# Altium PCB PCB-15_19_prototyp.PcbDoc (part 3 of 4)
Units mm, origin at the board's own origin, x right, y up, seen from the top; angles counter-clockwise.
Board outline 190 x 150 mm, 8 copper layers (Top Layer, VCC3V3, Internal Plane 1, Internal Plane 2, Mid-Layer 1, GND, Mid-Layer 2, Bottom Layer), stack 1.301 mm thick; 129 components, 396 nets, 1206 pads, 700 vias.
Unrouted connection lines stored in the file: 9.
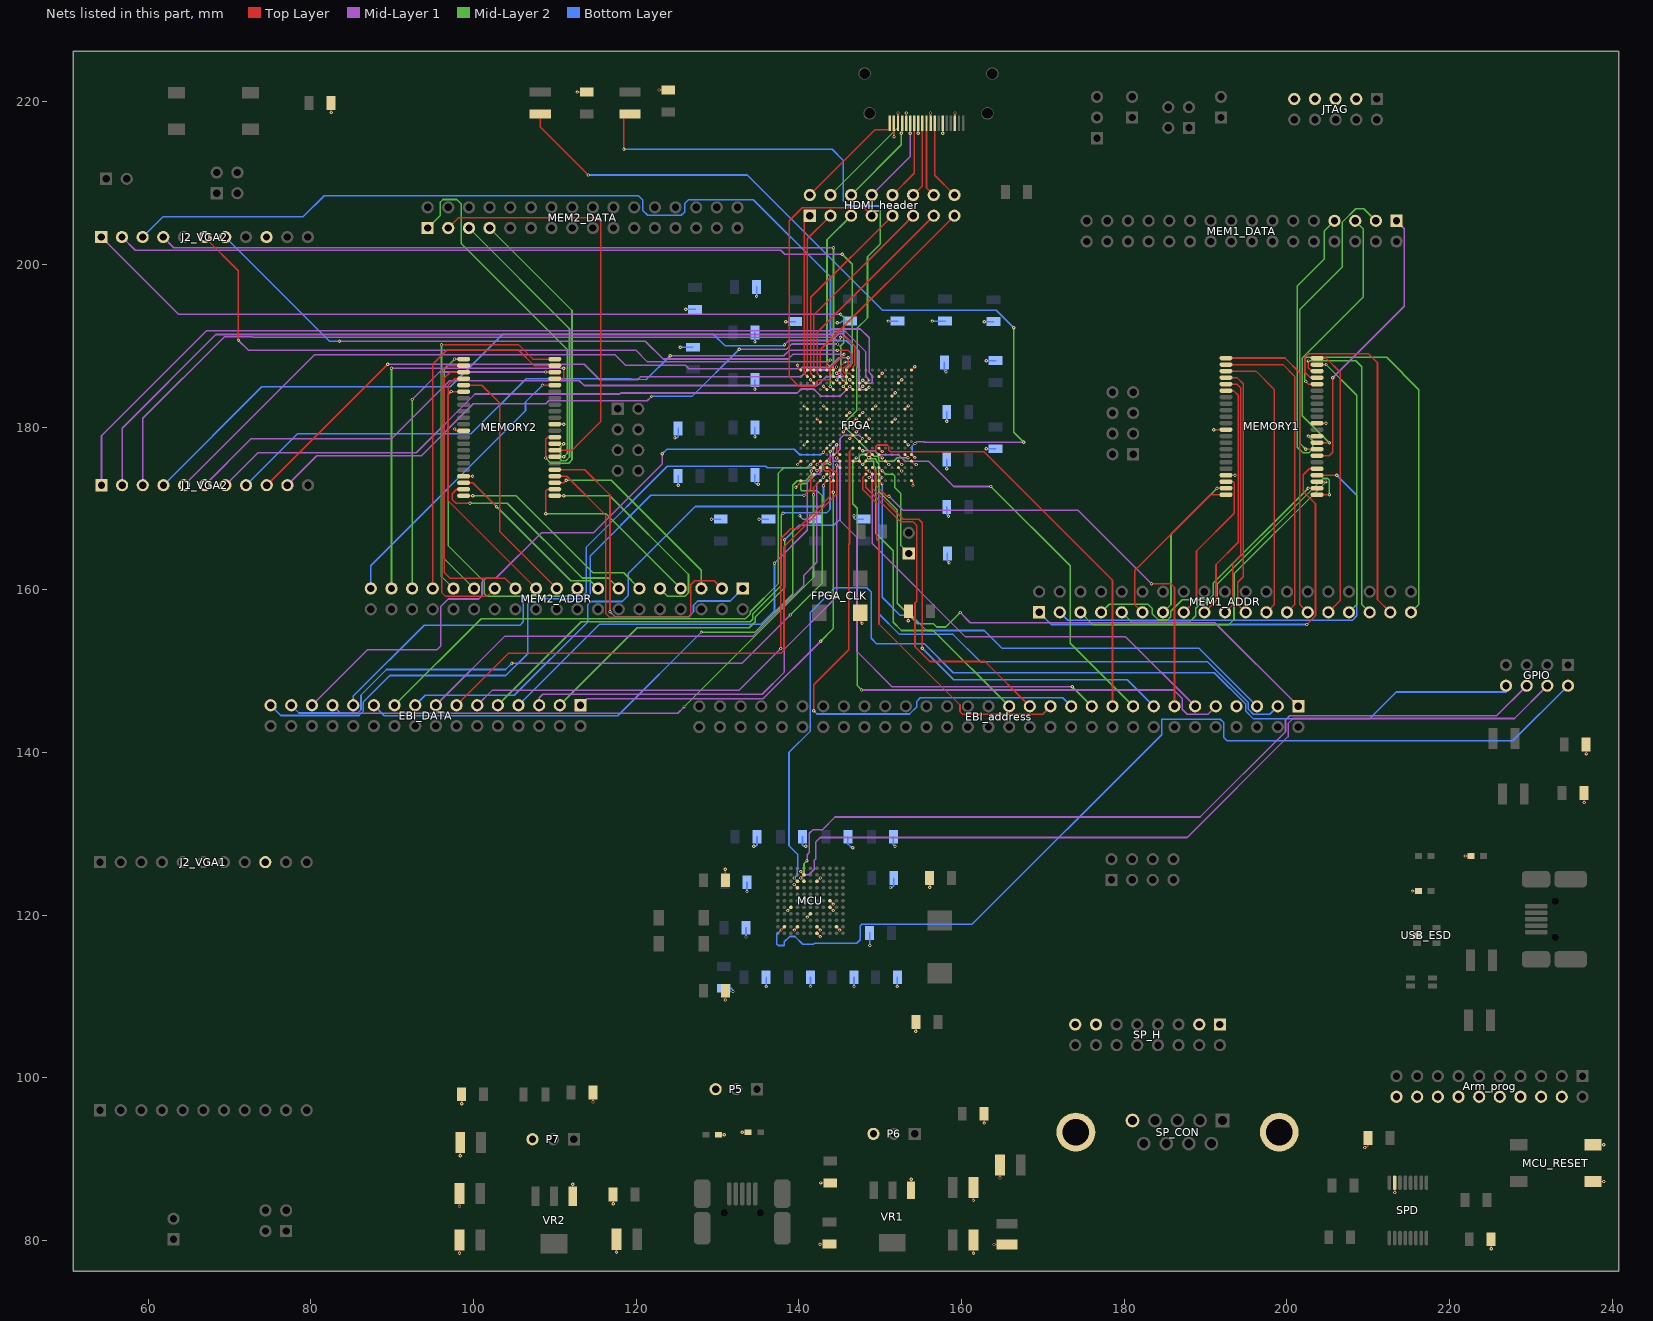
[diagram p9: the nets of this part, all layers, seen from the top]

## Via types
v1: diameter 0.4, hole 0.2, Top Layer to Bottom Layer, 696 vias
v2: diameter 7, hole 5, Top Layer to Bottom Layer, 4 vias

## Nets (pads, with @x,y where several pads share a name; then routed paths per layer and width w, separated by ;. In a path a pad name is that pad's centre, name@x,y a point inside that pad or via, vN(x,y) a via of type N, cw(c..) or ccw(c..) an arc to the next point about the centre after c; other vN are vias at no path point) (continued)
FPGA.A15: EBI_address.29 FPGA.R10 | length 41.4
  Top Layer w0.2: FPGA.R10@147.447,175.807 147.842,175.412 v1(147.853,175.412)
  Mid-Layer 2 w0.2: v1(147.853,175.412) 148.248,175.807 149.149,175.807 149.235,175.721 149.235,175.207 149.454,174.988 149.454,166.965 151.613,164.806 151.613,156.007 152.629,154.99 156.541,154.99 EBI_address.29@165.862,145.669
FPGA.A16: EBI_address.27 FPGA.V11 | length 41.1
  Top Layer w0.2: FPGA.V11@148.247,173.407 148.241,173.401 148.241,172.613 152.509,168.345 154.026,168.345 154.483,167.888 154.483,158.585 154.286,158.388 154.286,153.003 156.108,151.181 162.89,151.181 EBI_address.27@168.402,145.669
FPGA.A17: EBI_address.25 FPGA.U11 | length 46
  Top Layer w0.2: FPGA.U11@148.247,174.207 147.853,173.813 147.853,172.314 149.571,170.596 149.571,166.194 149.852,165.913 149.852,155.794 159.817,145.829 159.817,145.009 160.122,144.704 169.977,144.704 EBI_address.25@170.942,145.669
FPGA.A18: EBI_address.23 FPGA.N9 | length 67.7
  Top Layer w0.2: v1(141.844,145.115) 141.844,148.306 146.152,152.614 146.152,165.54 146.228,165.616 146.228,176.988 FPGA.N9@146.647,177.407
  Bottom Layer w0.2: v1(141.844,145.115) 142.24,144.719 153.619,144.719 154.518,145.618 154.518,146.304 154.925,146.71 172.441,146.71 EBI_address.23@173.482,145.669
FPGA.A19: EBI_address.21 FPGA.M10 | length 63.3
  Top Layer w0.2: FPGA.M10@147.447,178.207 v1(147.828,178.588)
  Mid-Layer 1 w0.2: v1(147.828,178.588) 147.409,179.007 145.491,179.007 145.059,178.575 145.059,177.292 144.167,176.4 144.167,176.051 144.434,175.784 144.841,175.784 145.059,175.565 145.059,168.504 147.142,166.421 147.142,152.4 151.46,148.082 v1(173.609,148.082)
  Mid-Layer 2 w0.2: v1(173.609,148.082) EBI_address.21@176.022,145.669
FPGA.A20: EBI_address.19 FPGA.P11 | length 53.7
  Top Layer w0.2: FPGA.P11@148.247,176.607 148.653,177.013 149.352,177.013 149.454,177.114 149.454,177.597 149.657,177.8 150.851,177.8 151.054,177.597 151.054,177.19 151.257,176.987 162.738,176.987 178.562,161.163 EBI_address.19@178.562,145.669
FPGA.A21: EBI_address.17 FPGA.N10 | length 52.4
  Top Layer w0.2: FPGA.N10@147.447,177.407 147.765,177.089 v1(147.853,177.089)
  Mid-Layer 1 w0.2: v1(147.853,177.089) 149.353,177.089 149.835,176.607 152.248,176.607 153.036,175.819 155.931,175.819 159.055,172.695 v1(163.601,172.695)
  Mid-Layer 2 w0.2: v1(163.601,172.695) 173.355,162.941 173.355,153.416 EBI_address.17@181.102,145.669
FPGA.A22: EBI_address.15 FPGA.V12 | length 55.7
  Top Layer w0.2: FPGA.V12@149.047,173.407 149.047,172.441 152.832,168.656 154.762,168.656 155.169,168.25 v1(155.169,152.806)
  Bottom Layer w0.2: v1(155.169,152.806) 159.055,148.92 180.391,148.92 EBI_address.15@183.642,145.669
FPGA.A23: EBI_address.13 FPGA.T12 | length 58.9
  Top Layer w0.2: FPGA.T12@149.047,175.007 149.428,174.626 149.428,172.878 150.805,171.501 v1(151.079,171.501) ; v1(183.363,160.731) 185.725,160.731 186.182,160.274 EBI_address.13@186.182,145.669
  Mid-Layer 1 w0.2: v1(151.079,171.501) 152.806,169.774 174.32,169.774 v1(183.363,160.731)
FPGA.A24: EBI_address.11 FPGA.T11 | length 57.8
  Top Layer w0.2: FPGA.T11@148.247,175.007 148.247,174.701 148.539,174.701 v1(148.641,174.6)
  Mid-Layer 1 w0.2: v1(148.641,174.6) 149.047,174.193 149.047,165.65 160.494,154.203 180.188,154.203 EBI_address.11@188.722,145.669
FPGA.A25: EBI_address.9 FPGA.R11 | length 77.7
  Top Layer w0.2: FPGA.R11@148.247,175.807 148.247,175.997 148.336,175.997 v1(148.565,176.225)
  Mid-Layer 1 w0.2: v1(147.752,147.676) 186.106,147.676 187.147,146.634 187.147,145.313 187.757,144.704 190.297,144.704 EBI_address.9@191.262,145.669
  Mid-Layer 2 w0.2: v1(147.752,147.676) 147.193,148.234 147.193,170.028 146.634,170.586 146.634,175.565 146.876,175.807 147.32,175.807 147.447,175.934 147.447,176.378 147.701,176.632 148.158,176.632 v1(148.565,176.225)
FPGA.AD00: EBI_DATA.31 FPGA.U3 | length 87.5
  Top Layer w0.2: v1(140.64,171.602) 141.453,172.415 141.453,173.813 FPGA.U3@141.847,174.207
  Bottom Layer w0.2: EBI_DATA.31@75.057,145.796 76.307,144.546 85.928,144.546 86.467,145.085 86.467,146.231 89.69,149.454 103.962,149.454 106.655,152.146 106.655,158.242 107.29,158.877 113.868,158.877 114.351,159.36 114.351,164.16 121.793,171.602 v1(140.64,171.602)
FPGA.AD01: EBI_DATA.29 FPGA.P6 | length 94.1
  Top Layer w0.2: v1(143.84,175.489) 143.84,176.2 FPGA.P6@144.247,176.607
  Mid-Layer 1 w0.2: v1(104.724,150.978) 133.02,150.978 v1(138.938,156.896)
  Mid-Layer 2 w0.2: v1(138.938,156.896) 142.9,160.858 142.9,171.526 142.24,172.187 140.36,172.187 140.233,172.314 140.233,172.923 140.372,173.061 140.891,173.061 142.048,174.219 142.443,174.219 142.799,174.574 142.799,175.489 v1(143.84,175.489)
  Bottom Layer w0.2: EBI_DATA.29@77.597,145.796 78.547,144.846 85.75,144.846 86.167,145.263 86.167,147.051 89.306,150.19 103.937,150.19 v1(104.724,150.978)
FPGA.AD02: EBI_DATA.27 FPGA.N5 | length 81.6
  Top Layer w0.2: v1(143.027,176.911) 143.027,176.987 FPGA.N5@143.447,177.407
  Mid-Layer 1 w0.2: EBI_DATA.27@80.137,145.796 86.97,152.629 95.504,152.629 95.961,153.086 95.961,157.937 96.881,158.857 100.666,158.857 101.041,159.233 101.041,160.934 101.504,161.397 102.748,161.397 108.356,167.005 114.757,167.005 123.215,175.463 v1(123.215,176.708)
  Bottom Layer w0.2: v1(123.215,176.708) 123.781,177.273 139.44,177.273 140.106,176.606 142.723,176.606 v1(143.027,176.911)
FPGA.AD03: EBI_DATA.25 FPGA.V4 | length 78.7
  Top Layer w0.2: v1(141.808,171.665) 141.808,172.568 FPGA.V4@142.647,173.407
  Mid-Layer 1 w0.2: EBI_DATA.25@82.677,145.796 83.642,144.831 125.12,144.831 v1(125.882,145.593)
  Mid-Layer 2 w0.2: v1(125.882,145.593) 141.808,161.519 v1(141.808,171.665)
FPGA.AD04: EBI_DATA.23 FPGA.T4 | length 75.6
  Top Layer w0.2: v1(142.24,174.625) 142.265,174.625 FPGA.T4@142.647,175.007
  Bottom Layer w0.2: EBI_DATA.23@85.217,145.796 85.217,146.929 93.939,155.651 105.715,155.651 106.121,156.058 106.121,158.877 106.426,159.182 113.386,159.182 113.843,159.639 113.843,165.202 123.825,175.184 135.942,175.184 136.119,175.007 141.858,175.007 v1(142.24,174.625)
FPGA.AD05: EBI_DATA.21 FPGA.T3 | length 75.4
  Top Layer w0.2: v1(141.529,174.6) 141.529,174.689 FPGA.T3@141.847,175.007
  Mid-Layer 2 w0.2: v1(128.023,154.795) 134.602,154.795 139.244,159.437 139.244,172.849 139.807,173.412 140.818,173.412 141.529,174.123 v1(141.529,174.6)
  Bottom Layer w0.2: EBI_DATA.21@87.757,145.796 89.027,144.526 117.754,144.526 v1(128.023,154.795)
FPGA.AD06: EBI_DATA.19 FPGA.R3 | length 72.1
  Top Layer w0.2: v1(141.453,175.412) FPGA.R3@141.847,175.807
  Mid-Layer 2 w0.2: EBI_DATA.19@90.297,145.796 100.951,156.45 133.455,156.45 134.036,157.031 134.036,157.302 137.49,160.757 137.49,174.346 138.151,175.006 141.046,175.006 v1(141.453,175.412)
FPGA.AD07: EBI_DATA.17 FPGA.V5 | length 66.4
  Top Layer w0.2: v1(143.027,172.784) 143.027,172.987 FPGA.V5@143.447,173.407
  Bottom Layer w0.2: EBI_DATA.17@92.837,145.796 94.056,147.015 105.029,147.015 114.071,156.058 114.071,158.176 114.452,158.557 118.298,158.557 119.05,159.309 119.05,162.027 127.254,170.231 142.875,170.231 143.027,170.383 v1(143.027,172.784)
FPGA.AD08: EBI_DATA.15 FPGA.U5 | length 66.2
  Top Layer w0.2: v1(143.027,173.838) 143.078,173.838 FPGA.U5@143.447,174.207
  Mid-Layer 1 w0.2: EBI_DATA.15@95.377,145.796 103.886,154.305 134.366,154.305 140.589,160.528 140.589,161.747 142.215,163.373 142.215,173.025 v1(143.027,173.838)
FPGA.AD09: EBI_DATA.13 FPGA.T5 | length 69
  Top Layer w0.2: EBI_DATA.13@97.917,145.796 104.292,152.171 137.77,152.171 138.176,152.578 138.176,165.303 144.653,171.78 144.653,174.346 144.399,174.6 144.117,174.6 143.71,175.007 FPGA.T5@143.447,175.007
FPGA.AD10: EBI_DATA.11 FPGA.R5 | length 67
  Top Layer w0.2: v1(137.77,152.781) 137.77,166.268 139.014,167.512 139.852,167.512 143.84,171.501 143.84,174.447 143.688,174.6 143.256,174.6 143.053,174.803 143.053,175.413 FPGA.R5@143.447,175.807
  Mid-Layer 1 w0.2: EBI_DATA.11@100.457,145.796 102.286,147.625 132.613,147.625 v1(137.77,152.781)
FPGA.AD11: EBI_DATA.9 FPGA.P7 | length 65.9
  Top Layer w0.2: v1(144.653,177.825) 144.653,177.001 FPGA.P7@145.047,176.607
  Mid-Layer 2 w0.2: EBI_DATA.9@102.997,145.796 113.259,156.058 134.036,156.058 134.341,156.362 134.341,157.023 137.846,160.528 137.846,169.189 v1(138.049,169.393)
  Bottom Layer w0.2: v1(138.049,169.393) 138.146,169.489 143.454,169.489 143.84,169.875 143.84,173.101 144.253,173.514 144.253,177.425 v1(144.653,177.825)
FPGA.AD12: EBI_DATA.7 FPGA.N6 | length 59.5
  Top Layer w0.2: v1(143.853,177.013) FPGA.N6@144.247,177.407
  Mid-Layer 1 w0.2: v1(137.008,163.271) 141.046,167.31 141.046,173.228 142.037,174.219 142.443,174.219 142.646,174.422 142.646,175.11 143.853,176.317 v1(143.853,177.013)
  Bottom Layer w0.2: EBI_DATA.7@105.537,145.796 115.494,155.753 135.342,155.753 137.008,157.418 v1(137.008,163.271)
FPGA.AD13: EBI_DATA.5 FPGA.T7 | length 61
  Top Layer w0.2: v1(144.653,175.337) 144.983,175.007 FPGA.T7@145.047,175.007
  Mid-Layer 1 w0.2: EBI_DATA.5@108.077,145.796 108.077,146.736 108.509,147.168 135.509,147.168 138.227,149.885 138.227,152.705 144.653,159.131 v1(144.653,175.337)
FPGA.AD14: EBI_DATA.3 FPGA.R7 | length 56
  Top Layer w0.2: v1(144.653,176.2) FPGA.R7@145.047,175.807
  Mid-Layer 2 w0.2: EBI_DATA.3@110.617,145.796 120.136,155.315 133.901,155.315 134.645,156.058 134.645,156.658 138.252,160.265 v1(138.252,166.141)
  Bottom Layer w0.2: v1(138.252,166.141) 140.03,167.919 144.297,167.919 145.059,168.681 145.059,175.793 v1(144.653,176.2)
FPGA.AD15: EBI_DATA.1 FPGA.V6 | length 53.2
  Top Layer w0.2: v1(144.247,171.983) FPGA.V6@144.247,173.407
  Mid-Layer 1 w0.2: EBI_DATA.1@113.157,145.796 113.98,146.619 135.638,146.619 v1(142.697,153.678)
  Mid-Layer 2 w0.2: v1(142.697,153.678) 144.247,155.228 v1(144.247,171.983)
FPGA.CLK_SIG: CLK_JMP.1 FPGA.T13 | length 12.6
  Top Layer w0.2: FPGA.T13@149.847,175.007 150.229,174.625 v1(150.241,174.625)
  Mid-Layer 2 w0.2: v1(150.241,174.625) 150.659,174.207 151.587,174.207 151.816,173.978 151.816,172.542 152.552,171.806 152.552,165.431 CLK_JMP.1@153.524,164.459
FPGA.CS0: EBI_address.5 FPGA.V13 | length 66.1
  Top Layer w0.2: FPGA.V13@149.847,173.407 v1(150.241,173.013)
  Bottom Layer w0.2: v1(150.241,173.013) 150.241,159.08 152.446,156.875 153.821,156.875 155.706,154.99 162.785,154.99 164.969,152.806 189.205,152.806 EBI_address.5@196.342,145.669
FPGA.CS1: EBI_address.7 FPGA.M11
FPGA.REN: EBI_address.1 FPGA.P12 | length 76.3
  Top Layer w0.2: v1(148.717,176.225) 148.793,176.301 148.793,176.607 FPGA.P12@149.047,176.607
  Mid-Layer 1 w0.2: v1(159.842,157.201) 161.087,155.956 191.135,155.956 EBI_address.1@201.422,145.669
  Mid-Layer 2 w0.2: v1(148.717,176.225) 148.835,176.107 149.399,176.107 149.535,175.971 149.535,175.807 149.835,175.507 149.835,172.068 152.095,169.807 152.095,158.344 154.635,155.804 156.566,155.804 156.947,155.423 158.064,155.423 v1(159.842,157.201)
FPGA.WEN: EBI_address.3 FPGA.U13 | length 72.5
  Top Layer w0.2: FPGA.U13@149.847,174.207 150.241,173.813 v1(150.241,173.787)
  Bottom Layer w0.2: v1(150.241,173.787) 149.835,173.38 149.835,157.048 152.375,154.508 158.953,154.508 162.331,151.13 190.246,151.13 195.275,146.101 195.275,145.313 195.885,144.704 197.917,144.704 EBI_address.3@198.882,145.669
FPGA_LEDS.LED_1: FPGA.P17 R3.1 | length 81.8
  Top Layer w0.2: v1(118.491,214.147) 118.491,218.487 R3.1@119.253,218.487 ; FPGA.P17@153.047,176.607 v1(153.429,176.225)
  Mid-Layer 2 w0.2: v1(150.012,207.188) 150.012,202.514 148.438,200.939 148.438,193.421 147.164,192.148 147.164,187.363 147.117,187.316 147.117,182.042 145.694,180.619 145.694,179.947 149.235,176.407 149.704,176.407 149.835,176.276 149.835,175.934 149.962,175.807 151.677,175.807 152.095,176.225 v1(153.429,176.225)
  Bottom Layer w0.2: v1(118.491,214.147) 144.094,214.147 145.44,212.801 145.44,207.874 146.126,207.188 v1(150.012,207.188)
FPGA_LEDS.LED_2: FPGA.P18 R4.1 | length 100.7
  Top Layer w0.2: R4.1@108.204,218.487 108.204,216.891 v1(114.097,210.998) ; FPGA.P18@153.847,176.607 154.203,176.251 v1(154.254,176.251)
  Mid-Layer 1 w0.2: v1(154.28,177.978) 154.508,178.206 155.423,178.206 155.499,178.13 v1(167.64,178.13)
  Mid-Layer 2 w0.2: v1(166.421,192.202) 166.421,179.349 v1(167.64,178.13)
  Bottom Layer w0.2: v1(114.097,210.998) 133.655,210.998 150.292,194.361 164.262,194.361 v1(166.421,192.202) ; v1(154.254,176.251) 153.924,176.581 153.924,177.673 154.229,177.978 v1(154.28,177.978)
FPGA_VGA-I/O.J1_P2: FPGA.A6 J1_VGA2.9 | length 78.2
  Top Layer w0.2: J1_VGA2.9@74.58,172.86 v1(89.451,187.731) ; FPGA.A6@144.247,187.007 v1(144.628,187.388)
  Mid-Layer 1 w0.2: v1(89.451,187.731) 113.614,187.731 115.538,185.807 120.161,185.807 120.561,186.207 140.284,186.207 141.091,187.014 144.254,187.014 v1(144.628,187.388)
FPGA_VGA-I/O.J1_P3: FPGA.C7 J1_VGA2.10 | length 80.2
  Top Layer w0.2: v1(144.653,185.801) FPGA.C7@145.047,185.407
  Mid-Layer 1 w0.2: J1_VGA2.10@77.12,172.86 80.739,176.479 93.599,176.479 99.974,182.855 108.89,182.855 109.271,183.236 121.361,183.236 v1(121.895,183.769) ; v1(132.664,189.56) 138.481,189.56 139.141,190.221 v1(144.755,190.221)
  Bottom Layer w0.2: v1(121.895,183.769) 126.873,183.769 v1(132.664,189.56) ; v1(144.653,185.801) 145.136,186.284 145.136,189.84 v1(144.755,190.221)
FPGA_VGA-I/O.J1_P8: FPGA.A8 J1_VGA2.8 | length 83.8
  Top Layer w0.2: v1(144.729,189.427) 146.069,189.427 146.52,188.976 146.52,188.066 146.369,187.529 FPGA.A8@145.847,187.007
  Mid-Layer 1 w0.2: v1(124.181,188.773) 138.158,188.773 138.812,189.427 v1(144.729,189.427)
  Bottom Layer w0.2: J1_VGA2.8@72.04,172.86 78.352,179.172 99.695,179.172 106.477,185.953 119.361,185.953 121.215,185.807 v1(124.181,188.773)
FPGA_VGA-I/O.J1_P9: FPGA.D9 J1_VGA2.7 | length 83.1
  Top Layer w0.2: v1(146.253,184.988) 146.266,184.988 FPGA.D9@146.647,184.607
  Mid-Layer 1 w0.2: J1_VGA2.7@69.5,172.86 73.5,176.86 92.964,176.86 100.178,184.074 117.989,184.074 118.11,184.194 139.821,184.194 140.303,184.677 141.853,184.677 142.735,183.794 145.059,183.794 v1(146.253,184.988)
FPGA_VGA-I/O.J1_P10: FPGA.C9 J1_VGA2.6 | length 86.1
  Top Layer w0.2: v1(146.253,185.826) 146.253,185.801 FPGA.C9@146.647,185.407
  Mid-Layer 1 w0.2: J1_VGA2.6@66.96,172.86 72.687,178.587 89.941,178.587 97.053,185.699 113.009,185.699 113.602,185.107 142.286,185.107 143.386,186.207 145.873,186.207 v1(146.253,185.826)
FPGA_VGA-I/O.J1_P11: FPGA.B9 J1_VGA2.5 | length 93
  Top Layer w0.2: v1(146.069,188.519) 146.069,187.757 145.669,187.357 145.574,187.357 145.466,187.249 145.466,186.842 145.694,186.614 146.24,186.614 FPGA.B9@146.647,186.207
  Mid-Layer 1 w0.2: J1_VGA2.5@64.42,172.86 80.434,188.874 117.424,188.874 118.694,187.604 126.06,187.604 126.492,187.173 140.208,187.173 140.36,187.325 143.693,187.325 144.887,188.519 v1(146.069,188.519)
FPGA_VGA-I/O.J1_P12: FPGA.A9 J1_VGA2.4 | length 97.4
  Top Layer w0.2: v1(145.11,191.059) 145.783,191.059 146.864,189.978 146.864,187.616 146.669,187.42 146.669,187.011 146.647,187.011 FPGA.A9@146.647,187.007
  Mid-Layer 1 w0.2: v1(138.227,190.119) 138.76,190.652 144.983,190.652 145.11,190.779 v1(145.11,191.059)
  Bottom Layer w0.2: J1_VGA2.4@61.88,172.86 73.983,184.963 97.13,184.963 103.581,191.414 129.489,191.414 130.912,189.992 138.1,189.992 v1(138.227,190.119)
FPGA_VGA-I/O.J1_P13: FPGA.D11 J1_VGA2.3 | length 108.1
  Top Layer w0.2: FPGA.D11@148.247,184.607 148.527,184.887 v1(148.641,184.887)
  Mid-Layer 1 w0.2: J1_VGA2.3@59.34,172.86 59.34,181.077 69.348,191.084 72.873,191.084 72.898,191.059 144.513,191.059 144.913,191.459 145.345,191.459 147.396,189.408 147.396,184.709 147.498,184.607 148.361,184.607 v1(148.641,184.887)
FPGA_VGA-I/O.J1_P14: FPGA.C11 J1_VGA2.2 | length 108.6
  Top Layer w0.2: FPGA.C11@148.247,185.407 v1(148.641,185.801)
  Mid-Layer 1 w0.2: J1_VGA2.2@56.8,172.86 56.8,179.863 68.326,191.389 144.04,191.389 144.41,191.759 145.731,191.759 148.247,189.243 148.247,186.195 v1(148.641,185.801)
FPGA_VGA-I/O.J1_P15: FPGA.C10 J1_VGA2.1 | length 114
  Top Layer w0.2: FPGA.C10@147.447,185.407 147.676,185.407 147.676,185.572 v1(147.853,185.75)
  Mid-Layer 1 w0.2: J1_VGA2.1@54.26,172.86 54.26,178.923 67.183,191.846 143.898,191.846 144.11,192.059 147.565,192.059 148.641,190.983 148.641,186.709 149.041,186.309 149.041,185.522 148.914,185.395 148.209,185.395 v1(147.853,185.75)
FPGA_VGA-I/O.J2_P0: FPGA.A5 J2_VGA2.6 | length 89.8
  Top Layer w0.2: J2_VGA2.6@66.94,203.36 71.095,199.205 v1(71.095,190.678) ; FPGA.A5@143.447,187.007 143.447,187.821 v1(143.868,188.242)
  Mid-Layer 1 w0.2: v1(71.095,190.678) 72.328,189.444 119.971,189.444 121.405,188.01 143.636,188.01 v1(143.868,188.242)
FPGA_VGA-I/O.J2_P1: FPGA.B6 J2_VGA2.7 | length 86.1
  Top Layer w0.2: FPGA.B6@144.247,186.207 143.866,186.588 143.866,187.249 v1(145.567,188.951)
  Mid-Layer 1 w0.2: v1(83.515,190.551) 121.133,190.551 123.317,188.366 138.709,188.366 139.294,188.951 v1(145.567,188.951)
  Bottom Layer w0.2: J2_VGA2.7@69.48,203.36 82.289,190.551 v1(83.515,190.551)
FPGA_VGA-I/O.J2_P4: FPGA.A7 J2_VGA2.3 | length 108
  Top Layer w0.2: FPGA.A7@145.047,187.007 145.047,187.389 v1(145.669,188.011)
  Bottom Layer w0.2: J2_VGA2.3@59.32,203.36 61.802,205.842 79.019,205.842 81.636,208.458 120.294,208.458 120.828,207.924 120.828,206.629 121.412,206.045 125.552,206.045 125.959,206.451 125.959,207.477 126.441,207.96 134.407,207.96 143.891,198.476 143.891,191.414 144.678,190.627 145.847,190.627 146.482,189.992 146.482,188.062 v1(145.669,188.011)
FPGA_VGA-I/O.J2_P5: FPGA.D8 J2_VGA2.2 | length 107.2
  Top Layer w0.2: v1(145.453,185.001) FPGA.D8@145.847,184.607
  Mid-Layer 1 w0.2: J2_VGA2.2@56.78,203.36 58.413,201.727 137.795,201.727 138.278,201.244 v1(145.339,201.244)
  Mid-Layer 2 w0.2: v1(145.339,201.244) 146.564,200.019 146.564,187.916 145.847,187.198 145.847,185.395 v1(145.453,185.001)
FPGA_VGA-I/O.J2_P6: FPGA.C8 J2_VGA2.4 | length 100.7
  Top Layer w0.2: v1(145.44,185.801) 145.453,185.801 FPGA.C8@145.847,185.407
  Mid-Layer 1 w0.2: J2_VGA2.4@61.86,203.36 63.163,202.057 v1(144.268,202.057)
  Mid-Layer 2 w0.2: v1(144.268,202.057) 144.268,187.842 144.204,187.777 144.204,186.357 144.36,186.201 145.04,186.201 v1(145.44,185.801)
FPGA_VGA-I/O.J2_P7: FPGA.B8 J2_VGA2.1 | length 104
  Top Layer w0.2: v1(144.628,186.614) 145.178,186.614 145.584,186.207 FPGA.B8@145.847,186.207
  Mid-Layer 1 w0.2: J2_VGA2.1@54.24,203.36 63.722,193.878 v1(145.136,193.878)
  Mid-Layer 2 w0.2: v1(144.628,186.614) 145.161,187.147 145.161,190.017 145.517,190.373 145.517,193.497 v1(145.136,193.878)
GND: ?.2 ?.5 ?.8 ?.11 ?.14 ?.17 Arm_prog.4 Arm_prog.6 Arm_prog.8 Arm_prog.10 Arm_prog.12 Arm_prog.14 Arm_prog.16 Arm_prog.18 Arm_prog.20 C1.2 C2.1 C3.1 C4.1 C5.1 C6.1 C7.1 C8.1 C9.1 C10.1 C11.1 C12.1 C13.1 C14.1 C15.1 C16.1 C17.1 C18.1 C19.1 C20.2 C21.1 C22.1 C23.1 C24.1 C25.2 C27.1 C28.1 C29.1 C30.1 C33.1 C35.1 C36.2 C37.2 C38.1 C39.1 C40.2 C41.2 C42.2 C43.1 C44.2 C45.2 C46.1 C47.1 C48.2 C49.2 C50.1 C51.1 C52.1 C53.1 C54.2 C55.2 C56.2 C57.1 C58.1 C59.2 C60.2 C61.1 D1.2 D2.2 D3.2 D4.2 D5.2 D6.2 FPGA.A1 FPGA.A18 FPGA.B7 FPGA.B13 FPGA.C3 FPGA.C16 FPGA.D5 FPGA.D10 FPGA.E15 FPGA.G2 FPGA.G5 FPGA.G12 FPGA.G17 FPGA.H8 FPGA.H10 FPGA.J4 FPGA.J9 FPGA.J11 FPGA.J15 FPGA.K8 FPGA.K10 FPGA.L9 FPGA.L11 FPGA.M2 FPGA.M6 FPGA.M17 FPGA.N13 FPGA.P13 FPGA.R1 FPGA.R4 FPGA.R9 FPGA.R14 FPGA.R16 FPGA.R18 FPGA.T16 FPGA.U6 FPGA.U12 FPGA.V1 FPGA.V18 FPGA_CLK.2 J2_VGA1.9 J2_VGA2.9 JTAG.3 JTAG.5 JTAG.7 JTAG.9 L3.1 L4.1 L5.1 L6.1 MCU.C7 MCU.D4 MCU.F9 MCU.G3 MCU.G9 MCU.H6 MCU.K4 MCU.K7 MCU.K10 MCU.L7 MCU_RESET.2 MCU_RESET.4 MEMORY1.12 MEMORY1.34 MEMORY1.41 MEMORY2.12 MEMORY2.34 MEMORY2.41 P5.3 P6.3 P7.3 R7.2 SP_CON.5 SP_CON.10 SP_CON.11 SP_H.1 SP_H.3 SP_H.13 SP_H.15 SPD.15 USB_ESD.2 VR1.1 VR2.1 | length 139.1
  Top Layer w0.2: v1(82.503,218.687) R7.2@82.503,219.837 ; v1(97.694,179.762) 97.694,179.706 97.841,179.559 MEMORY2.34@98.794,179.559 ; v1(98.275,78.44) C12.1@98.275,80.04 ; v1(98.275,84.17) C13.1@98.275,85.77 ; v1(98.385,90.42) C61.1@98.385,92.02 ; v1(98.55,96.82) C30.1@98.55,97.97 ; MEMORY2.41@98.794,173.959 v1(99.894,173.959) ; MEMORY2.12@109.994,180.359 v1(111.094,180.359) ; VR2.1@112.206,85.406 v1(112.206,86.906) ; v1(112.769,221.187) D6.2@113.919,221.187 ; v1(114.69,97.02) D2.2@114.69,98.17 ; v1(117.18,84.51) C29.1@117.18,85.66 ; v1(117.575,78.55) C11.1@117.575,80.15 ; v1(122.802,221.441) D5.2@123.952,221.441 ; L6.1@130.115,92.98 v1(130.84,92.98) ; v1(130.968,109.555) C22.1@130.968,110.705 ; C21.1@130.968,124.294 v1(130.968,125.647) ; v1(133.04,93.29) L5.1@133.765,93.29 ; v1(138.629,120.554) MCU.G3@139.029,120.954 ; v1(139.429,118.154) MCU.K4@139.829,118.554 ; v1(139.429,123.754) MCU.D4@139.829,123.354 ; v1(139.644,172.601) 140.247,173.204 FPGA.V1@140.247,173.407 ; v1(139.847,175.407) FPGA.R1@140.247,175.807 ; v1(139.847,187.61) 139.847,187.407 FPGA.A1@140.247,187.007 ; v1(140.647,177.807) FPGA.M2@141.047,178.207 ; v1(140.647,182.607) FPGA.G2@141.047,182.207 ; v1(141.029,119.754) MCU.H6@141.429,120.154 ; v1(141.447,185.807) FPGA.C3@141.847,185.407 ; MCU.L7@142.229,117.754 v1(142.629,117.354) ; MCU.K7@142.229,118.554 v1(142.629,118.154) ; MCU.C7@142.229,124.154 v1(142.629,124.554) ; v1(142.247,175.407) FPGA.R4@142.647,175.807 ; v1(142.247,181.007) FPGA.J4@142.647,180.607 ; v1(142.61,79.54) C28.1@143.76,79.54 ; v1(142.71,87.07) C27.1@143.86,87.07 ; v1(143.047,182.607) FPGA.G5@143.447,182.207 ; v1(143.047,185.007) FPGA.D5@143.447,184.607 ; MCU.G9@143.829,120.954 v1(144.229,120.554) ; MCU.F9@143.829,121.754 v1(144.229,121.354) ; v1(143.847,173.807) FPGA.U6@144.247,174.207 ; v1(143.847,177.807) FPGA.M6@144.247,178.207 ; MCU.K10@144.629,118.554 v1(145.029,118.154) ; v1(144.647,186.607) FPGA.B7@145.047,186.207 ; v1(145.447,179.407) FPGA.K8@145.847,179.807 ; FPGA.H8@145.847,181.407 v1(146.247,181.807) ; v1(146.247,178.607) FPGA.L9@146.647,179.007 ; FPGA.R9@146.647,175.807 v1(147.047,176.207) ; FPGA.J9@146.647,180.607 v1(147.047,181.007) ; v1(147.047,179.407) FPGA.K10@147.447,179.807 ; FPGA.H10@147.447,181.407 v1(147.847,181.807) ; FPGA.D10@147.447,184.607 v1(147.847,185.007) ; FPGA_CLK.2@147.574,157.174 147.574,156.077 v1(147.777,155.874) ; FPGA.L11@148.247,179.007 v1(148.647,178.607) ; FPGA.J11@148.247,180.607 v1(148.647,181.007) ; v1(148.647,173.807) FPGA.U12@149.047,174.207 ; FPGA.G12@149.047,182.207 v1(149.447,182.607) ; FPGA.P13@149.847,176.607 v1(150.247,176.207) ; FPGA.N13@149.847,177.407 v1(150.247,177.007) ; FPGA.B13@149.847,186.207 v1(150.247,186.607) ; FPGA.R14@150.647,175.807 v1(151.047,175.407) ; FPGA.J15@151.447,180.607 v1(151.847,181.007) ; FPGA.E15@151.447,183.807 v1(151.847,184.207) ; v1(151.695,215.711) ?.2@151.695,217.367 ; FPGA.T16@152.247,175.007 v1(152.647,174.607) ; FPGA.R16@152.247,175.807 v1(152.647,175.407) ; FPGA.C16@152.247,185.407 v1(152.647,185.807) ; FPGA.M17@153.047,178.207 v1(153.447,177.807) ; FPGA.G17@153.047,182.207 v1(153.447,182.607) ; ?.5@153.195,217.367 v1(153.195,218.617) ; v1(153.463,156.203) C25.2@153.463,157.353 ; VR1.1@153.811,86.156 v1(153.811,87.531) ; FPGA.V18@153.847,173.407 154.044,173.21 v1(154.044,172.804) ; FPGA.R18@153.847,175.807 154.247,175.407 v1(154.45,175.407) ; FPGA.A18@153.847,187.007 v1(154.247,187.407) ; v1(154.39,105.72) C23.1@154.39,106.87 ; v1(154.695,216.117) ?.8@154.695,217.367 ; v1(156.09,123.42) C24.1@156.09,124.57 ; ?.11@156.195,217.367 v1(156.195,218.617) ; v1(157.695,216.117) ?.14@157.695,217.367 ; ?.17@159.195,217.367 v1(159.195,218.617) ; v1(161.465,78.44) C4.1@161.465,80.04 ; v1(161.465,84.91) C5.1@161.465,86.51 ; v1(162.79,94.43) D1.2@162.79,95.58 ; v1(164,79.505) C7.1@165.6,79.505 ; v1(164.735,87.68) C6.1@164.735,89.28 ; v1(191.014,179.686) MEMORY1.34@192.52,179.686 ; MEMORY1.41@192.52,174.086 v1(193.62,174.086) ; MEMORY1.12@203.72,180.486 v1(204.82,180.486) ; v1(209.572,91.433) 209.768,91.433 209.978,91.643 C35.1@209.978,92.583 ; v1(213.259,85.893) SPD.15@213.259,87.093 ; v1(215.192,117.492) USB_ESD.2@215.992,117.492 ; v1(215.438,122.953) L3.1@216.163,122.953 ; v1(221.915,127.271) L4.1@222.64,127.271 ; v1(225.124,78.987) C33.1@225.124,80.137 ; v1(236.554,133.851) D4.2@236.554,135.001 ; v1(236.808,139.82) D3.2@236.808,140.97 ; MCU_RESET.2@237.617,87.249 v1(238.967,87.249) ; MCU_RESET.4@237.617,91.749 v1(238.967,91.749)
  Bottom Layer w0.2: v1(124.764,178.676) 125.03,178.676 125.17,178.816 C44.2@125.17,179.826 ; v1(125.17,172.834) C40.2@125.17,173.984 ; v1(125.425,189.812) C45.2@126.981,189.812 ; v1(126.085,194.478) C46.1@127.235,194.478 ; v1(129.26,168.683) C60.2@130.41,168.683 ; C17.1@130.761,111.006 131.674,111.006 131.911,110.769 v1(131.911,110.6) ; v1(133.508,117.302) C18.1@133.508,118.452 ; v1(133.635,122.89) C20.2@133.635,124.04 ; v1(134.452,128.478) 134.722,128.478 134.858,128.614 C10.1@134.858,129.628 ; C39.1@134.601,174.111 134.601,173.164 134.804,172.961 v1(135.007,172.961) ; v1(134.601,178.803) C38.1@134.601,179.953 ; v1(134.601,184.645) C37.2@134.601,185.795 ; v1(134.601,190.487) C36.2@134.601,191.637 ; v1(134.808,196.075) C52.1@134.808,197.225 ; v1(135.102,168.683) C59.2@136.252,168.683 ; v1(135.981,111.206) C9.1@135.981,112.356 ; v1(138.404,192.954) C51.1@139.554,192.954 ; v1(140.131,169.089) 140.131,169.062 140.511,168.683 C58.1@142.094,168.683 ; C14.1@140.446,129.628 140.446,128.626 140.594,128.478 v1(140.852,128.478) ; v1(141.442,111.206) C8.1@141.442,112.356 ; v1(144.729,192.831) 145.135,192.831 145.338,193.034 C50.1@146.285,193.034 ; C16.1@146.034,129.628 146.034,128.748 146.507,128.275 v1(146.644,128.275) ; v1(146.776,111.206) C3.1@146.776,112.356 ; v1(146.786,169.089) 146.786,168.811 146.914,168.683 C57.1@147.936,168.683 ; v1(148.715,116.261) C1.2@148.715,117.817 ; v1(150.977,193.034) C49.2@152.127,193.034 ; v1(151.263,123.398) 151.466,123.398 151.669,123.601 C19.1@151.669,124.548 ; C15.1@151.622,129.628 151.622,128.681 v1(151.825,128.478) ; v1(152.11,111.206) C2.1@152.11,112.356 ; v1(156.413,193.034) C48.2@157.969,193.034 ; C53.1@157.889,187.954 157.889,187.007 v1(158.092,186.804) ; C56.2@158.19,170.174 158.19,169.266 158.432,169.024 v1(158.393,169.024) ; v1(158.19,174.866) C55.2@158.19,176.016 ; v1(158.19,180.708) C54.2@158.19,181.858 ; C47.1@158.27,164.459 158.27,163.512 v1(158.473,163.309) ; v1(162.788,192.954) C43.1@163.938,192.954 ; v1(163.042,177.333) C41.2@164.192,177.333 ; v1(163.042,188.161) C42.2@164.192,188.161
GPIO.GPIO0: GPIO.2 MCU.K2 | length 119.5
  Top Layer w0.2: v1(137.82,118.161) 137.836,118.161 MCU.K2@138.229,118.554
  Bottom Layer w0.2: v1(137.82,118.161) 137.293,117.634 137.293,116.434 137.465,116.262 138.176,116.262 138.216,116.302 138.216,116.707 138.882,117.373 139.522,117.373 140.481,116.415 141.808,116.415 141.929,116.535 147.117,116.535 147.549,116.967 147.549,118.669 147.752,118.872 161.29,118.872 184.607,142.189 184.607,144.069 184.633,144.094 191.821,144.094 192.227,143.688 192.227,141.834 192.634,141.427 227.787,141.427 GPIO.2@234.569,148.209
GPIO.GPIO1: GPIO.4 MCU.B5 | length 105
  Top Layer w0.2: v1(140.233,125.349) MCU.B5@140.629,124.954
  Mid-Layer 1 w0.2: v1(140.233,125.349) 140.633,124.949 141.224,124.949 141.915,125.64 141.915,126.733 142.083,126.902 142.083,128.976 142.646,129.54 187.738,129.54 200.152,141.954 200.152,143.561 200.762,144.17 227.99,144.17 GPIO.4@232.029,148.209
GPIO.GPIO2: GPIO.6 MCU.C5 | length 103.1
  Top Layer w0.2: v1(140.233,124.562) 140.629,124.358 MCU.C5@140.629,124.154
  Mid-Layer 1 w0.2: v1(140.995,126.67) 141.021,126.695 141.021,127.432 141.275,127.686 141.275,130.048 141.732,130.505 142.9,130.505 144.45,132.055 189.332,132.055 199.832,142.555 199.832,143.977 200.355,144.501 225.781,144.501 GPIO.6@229.489,148.209
  Mid-Layer 2 w0.2: v1(140.233,124.562) 140.633,124.962 140.633,126.308 v1(140.995,126.67)
GPIO.GPIO3: GPIO.8 MCU.C4 | length 134.4
  Top Layer w0.2: v1(139.421,124.562) 139.827,124.154 MCU.C4@139.829,124.154
  Bottom Layer w0.2: v1(139.421,124.562) 139.827,124.968 139.827,125.755 139.852,125.781 139.852,127.457 138.786,128.524 138.786,140.005 141.427,142.646 141.427,157.226 144.45,160.249 148.361,160.249 148.895,159.715 148.895,154.026 149.555,153.365 155.448,153.365 159.004,149.809 191.069,149.809 194.97,145.908 194.97,145.059 195.91,144.12 210.134,144.12 213.436,147.422 226.949,147.422 GPIO.8@226.949,148.209
HDMI.CLK+: FPGA.B4 HDMI_header.13 | length 25.9
  Top Layer w0.2: FPGA.B4@142.647,186.207 142.265,186.589 142.265,191.668 HDMI_header.13@156.591,205.994
HDMI.CLK-: FPGA.A4 HDMI_header.15 | length 25.8
  Top Layer w0.2: FPGA.A4@142.647,187.007 142.647,189.51 HDMI_header.15@159.131,205.994
HDMI.D0+: FPGA.B3 HDMI_header.9 | length 24.1
  Top Layer w0.2: FPGA.B3@141.847,186.207 141.467,186.587 141.467,195.95 HDMI_header.9@151.511,205.994
HDMI.D0-: FPGA.A3 HDMI_header.11 | length 24
  Top Layer w0.2: FPGA.A3@141.847,187.007 141.847,193.79 HDMI_header.11@154.051,205.994
HDMI.D1+: FPGA.D6 HDMI_header.5 | length 22.9
  Top Layer w0.2: v1(143.858,184.996) FPGA.D6@144.247,184.607
  Mid-Layer 2 w0.2: v1(143.858,184.996) 143.858,187.404 143.468,187.795 143.468,203.031 HDMI_header.5@146.431,205.994
HDMI.D1-: FPGA.C6 HDMI_header.7 | length 37
  Top Layer w0.2: FPGA.C6@144.247,185.407 143.853,185.801 142.443,185.801 142.24,185.598 142.24,185.217 142.037,185.014 140.005,185.014 138.811,186.207 138.811,205.359 140.411,206.959 148.006,206.959 HDMI_header.7@148.971,205.994
HDMI.D2+: FPGA.B2 HDMI_header.1 | length 20.3
  Top Layer w0.2: FPGA.B2@141.047,186.207 141.047,186.411 140.868,186.411 140.665,186.614 140.665,205.308 HDMI_header.1@141.351,205.994
HDMI.D2-: FPGA.A2 HDMI_header.3 | length 20.2
  Top Layer w0.2: FPGA.A2@141.047,187.007 141.047,203.15 HDMI_header.3@143.891,205.994
I_HDMI.CLK+: ?.10 HDMI_header.14 | length 9.2
  Top Layer w0.2: ?.10@155.695,217.367 155.695,209.43 HDMI_header.14@156.591,208.534
I_HDMI.CLK-: ?.12 HDMI_header.16 | length 9.8
  Top Layer w0.2: ?.12@156.695,217.367 156.695,210.97 HDMI_header.16@159.131,208.534
I_HDMI.D0+: ?.7 HDMI_header.10 | length 9.9
  Top Layer w0.2: HDMI_header.10@151.511,208.534 154.195,211.218 ?.7@154.195,217.367
I_HDMI.D0-: ?.9 HDMI_header.12 | length 9.3
  Top Layer w0.2: HDMI_header.12@154.051,208.534 155.195,209.678 ?.9@155.195,217.367
I_HDMI.D1+: ?.4 HDMI_header.6 | length 11.4
  Top Layer w0.2: v1(152.603,216.129) 152.695,216.22 ?.4@152.695,217.367
  Mid-Layer 2 w0.2: HDMI_header.6@146.431,208.534 152.603,214.706 v1(152.603,216.129)
I_HDMI.D1-: ?.6 HDMI_header.8 | length 10.8
  Top Layer w0.2: v1(153.695,216.129) ?.6@153.695,217.367
  Mid-Layer 1 w0.2: HDMI_header.8@148.971,208.534 153.695,213.258 v1(153.695,216.129)
I_HDMI.D2+: ?.1 HDMI_header.2 | length 14
  Top Layer w0.2: HDMI_header.2@141.351,208.534 149.377,216.56 151.195,216.56 ?.1@151.195,217.367
I_HDMI.D2-: ?.3 HDMI_header.4 | length 14.8
  Top Layer w0.2: ?.3@152.195,217.367 152.195,218.616 v1(152.197,218.618)
  Mid-Layer 2 w0.2: HDMI_header.4@143.891,208.534 152.197,216.84 v1(152.197,218.618)
I_MEMORY.ADDR0_Data_mem1: MEM1_ADDR.1 MEMORY1.5 | length 55
  Top Layer w0.2: v1(202.438,155.727) 203.53,156.82 203.53,170.574 202.013,172.091 202.013,174.149 202.75,174.886 MEMORY1.5@203.72,174.886
  Bottom Layer w0.2: MEM1_ADDR.1@169.545,157.226 171.044,155.727 v1(202.438,155.727)
I_MEMORY.ADDR0_Data_mem2: MEM2_ADDR.1 MEMORY2.5 | length 40.9
  Top Layer w0.2: MEMORY2.5@109.994,174.759 113.69,174.759 116.789,171.66 v1(116.789,157.302)
  Bottom Layer w0.2: v1(116.789,157.302) 117.45,156.642 126.416,156.642 127.051,157.277 127.051,158.09 127.584,158.623 131.572,158.623 MEM2_ADDR.1@133.096,160.147
I_MEMORY.ADDR1_Data_mem1: MEM1_ADDR.3 MEMORY1.4 | length 57.9
  Top Layer w0.2: MEMORY1.4@203.72,174.086 v1(206.146,174.086)
  Bottom Layer w0.2: MEM1_ADDR.3@172.085,157.226 173.05,156.261 208.077,156.261 208.61,156.794 208.61,171.622 v1(206.146,174.086)
I_MEMORY.ADDR1_Data_mem2: MEM2_ADDR.3 MEMORY2.4 | length 39.3
  Top Layer w0.2: MEMORY2.4@109.994,173.959 111.461,173.959 116.281,169.139 116.281,157.048 116.688,156.642 126.492,156.642 126.721,156.87 126.721,160.63 127.203,161.112 129.591,161.112 MEM2_ADDR.3@130.556,160.147
I_MEMORY.ADDR2_Data_mem1: MEM1_ADDR.5 MEMORY1.3 | length 42.5
  Top Layer w0.2: MEMORY1.3@203.72,173.286 204.775,173.286 v1(204.804,173.257)
  Mid-Layer 2 w0.2: MEM1_ADDR.5@174.625,157.226 176.175,155.676 192.836,155.676 193.497,156.337 193.497,161.95 v1(204.804,173.257)
I_MEMORY.ADDR2_Data_mem2: MEM2_ADDR.5 MEMORY2.3 | length 25
  Top Layer w0.2: MEMORY2.3@109.994,173.159 111.1,173.159 v1(111.397,173.457)
  Mid-Layer 2 w0.2: v1(111.397,173.457) 116.942,173.457 128.016,162.382 MEM2_ADDR.5@128.016,160.147
I_MEMORY.ADDR3_Data_mem1: MEM1_ADDR.7 MEMORY1.2 | length 36.1
  Top Layer w0.2: v1(202.616,172.491) 202.621,172.486 MEMORY1.2@203.72,172.486
  Mid-Layer 2 w0.2: MEM1_ADDR.7@177.165,157.226 178.156,158.217 182.931,158.217 183.464,157.683 183.464,157.023 184.211,156.276 185.318,156.276 185.735,156.693 185.735,157.363 187.147,158.775 190.398,158.775 190.932,159.309 190.932,160.807 v1(202.616,172.491)
I_MEMORY.ADDR3_Data_mem2: MEM2_ADDR.7 MEMORY2.2 | length 24.4
  Top Layer w0.2: v1(108.89,169.342) 108.89,172.13 109.118,172.359 MEMORY2.2@109.994,172.359
  Mid-Layer 2 w0.2: v1(108.89,169.342) 116.281,169.342 MEM2_ADDR.7@125.476,160.147
I_MEMORY.ADDR4_Data_mem1: MEM1_ADDR.9 MEMORY1.1 | length 38.4
  Top Layer w0.2: MEMORY1.1@203.72,171.686 v1(205.232,171.686)
  Mid-Layer 2 w0.2: MEM1_ADDR.9@179.705,157.226 180.955,155.976 187.98,155.976 188.798,156.794 188.798,157.709 189.509,158.42 191.008,158.42 191.455,158.867 191.455,160.706 204.434,173.685 205.029,173.685 205.232,173.482 v1(205.232,171.686)
I_MEMORY.ADDR4_Data_mem2: MEM2_ADDR.9 MEMORY2.1 | length 26.8
  Top Layer w0.2: MEMORY2.1@109.994,171.559 v1(111.1,171.559)
  Mid-Layer 2 w0.2: v1(111.1,171.559) 116.756,171.559 126.441,161.874 126.441,159.639 125.984,159.182 123.901,159.182 MEM2_ADDR.9@122.936,160.147
I_MEMORY.ADDR5_Data_mem1: MEM1_ADDR.11 MEMORY1.44 | length 20.6
  Top Layer w0.2: MEM1_ADDR.11@182.245,157.226 181.28,158.191 181.28,162.339 190.627,171.686 MEMORY1.44@192.52,171.686
I_MEMORY.ADDR5_Data_mem2: MEM2_ADDR.11 MEMORY2.44 | length 26.3
  Top Layer w0.2: MEMORY2.44@98.794,171.559 v1(99.898,171.559)
  Mid-Layer 2 w0.2: v1(99.898,171.559) 105.225,171.559 114.706,162.077 118.466,162.077 MEM2_ADDR.11@120.396,160.147
I_MEMORY.ADDR6_Data_mem1: MEM1_ADDR.13 MEMORY1.43 | length 19.1
  Top Layer w0.2: v1(191.414,172.491) 191.42,172.486 MEMORY1.43@192.52,172.486
  Mid-Layer 2 w0.2: MEM1_ADDR.13@184.785,157.226 185.75,158.191 185.75,166.827 v1(191.414,172.491)
I_MEMORY.ADDR6_Data_mem2: MEM2_ADDR.13 MEMORY2.43 | length 27.4
  Top Layer w0.2: MEMORY2.43@98.794,172.359 97.937,172.359 97.388,171.81 97.388,171.094 97.846,170.637 v1(99.568,170.637)
  Mid-Layer 2 w0.2: v1(99.568,170.637) 104.165,170.637 113.36,161.442 116.561,161.442 MEM2_ADDR.13@117.856,160.147
I_MEMORY.ADDR7_Data_mem1: MEM1_ADDR.15 MEMORY1.42 | length 19.5
  Top Layer w0.2: MEM1_ADDR.15@187.325,157.226 188.9,158.801 188.9,164.77 193.523,169.393 193.523,173.126 193.363,173.286 MEMORY1.42@192.52,173.286
I_MEMORY.ADDR7_Data_mem2: MEM2_ADDR.15 MEMORY2.42 | length 21.9
  Top Layer w0.2: MEMORY2.42@98.794,173.159 99.898,173.159 v1(102.845,170.213)
  Mid-Layer 2 w0.2: v1(102.845,170.213) 111.945,161.112 114.351,161.112 MEM2_ADDR.15@115.316,160.147
I_MEMORY.ADDR8_Data_mem1: MEM1_ADDR.17 MEMORY1.28 | length 30.2
  Top Layer w0.2: MEM1_ADDR.17@189.865,157.226 191.287,158.648 191.287,163.093 194.031,165.837 194.031,183.896 193.441,184.486 MEMORY1.28@192.52,184.486
I_MEMORY.ADDR8_Data_mem2: MEM2_ADDR.17 MEMORY2.28 | length 40.4
  Top Layer w0.2: v1(97.282,184.379) 97.302,184.359 MEMORY2.28@98.794,184.359
  Mid-Layer 2 w0.2: v1(97.282,184.379) 96.876,183.972 96.876,165.43 101.346,160.96 101.346,159.512 101.676,159.182 111.811,159.182 MEM2_ADDR.17@112.776,160.147
I_MEMORY.ADDR9_Data_mem1: MEM1_ADDR.19 MEMORY1.27 | length 30.4
  Top Layer w0.2: MEM1_ADDR.19@192.405,157.226 193.37,158.191 193.37,163.22 194.335,164.186 194.335,184.803 193.853,185.286 MEMORY1.27@192.52,185.286
I_MEMORY.ADDR9_Data_mem2: MEM2_ADDR.19 MEMORY2.27 | length 31.1
  Top Layer w0.2: MEMORY2.27@98.794,185.159 101.016,185.159 103.251,182.924 103.251,167.132 MEM2_ADDR.19@110.236,160.147
I_MEMORY.ADDR10_Data_mem1: MEM1_ADDR.21 MEMORY1.26 | length 31.2
  Top Layer w0.2: MEMORY1.26@192.52,186.086 193.873,186.086 194.64,185.318 194.64,161.595 193.98,160.934 193.98,158.191 MEM1_ADDR.21@194.945,157.226
I_MEMORY.ADDR10_Data_mem2: MEM2_ADDR.21 MEMORY2.26 | length 31.7
  Top Layer w0.2: MEMORY2.26@98.794,185.959 97.688,185.959 96.876,185.146 96.876,170.967 MEM2_ADDR.21@107.696,160.147
I_MEMORY.ADDR11_Data_mem1: MEM1_ADDR.23 MEMORY1.25 | length 34.7
  Top Layer w0.2: MEMORY1.25@192.52,186.886 196.197,186.886 198.45,184.633 198.45,158.191 MEM1_ADDR.23@197.485,157.226
I_MEMORY.ADDR11_Data_mem2: MEM2_ADDR.23 MEMORY2.25 | length 36.2
  Top Layer w0.2: MEMORY2.25@98.794,186.759 97.13,186.759 96.384,186.014 96.384,162.137 97.13,161.392 103.911,161.392 MEM2_ADDR.23@105.156,160.147
I_MEMORY.ADDR12_Data_mem1: MEM1_ADDR.25 MEMORY1.24 | length 38.5
  Top Layer w0.2: MEMORY1.24@192.52,187.686 199.517,187.686 200.99,186.213 200.99,158.191 MEM1_ADDR.25@200.025,157.226
I_MEMORY.ADDR12_Data_mem2: MEM2_ADDR.25 MEMORY2.24 | length 37.4
  Top Layer w0.2: MEMORY2.24@98.794,187.559 96.723,187.559 96.079,186.915 96.079,159.674 96.571,159.182 101.651,159.182 MEM2_ADDR.25@102.616,160.147
I_MEMORY.ADDR13_Data_mem1: MEM1_ADDR.27 MEMORY1.23 | length 39.7
  Top Layer w0.2: MEMORY1.23@192.52,188.486 199.778,188.486 201.6,186.665 201.6,158.191 MEM1_ADDR.27@202.565,157.226
I_MEMORY.ADDR13_Data_mem2: MEM2_ADDR.27 MEMORY2.23 | length 31.4
  Top Layer w0.2: v1(97.688,188.366) 97.696,188.359 MEMORY2.23@98.794,188.359
  Mid-Layer 2 w0.2: v1(97.688,188.366) 96.384,187.062 96.384,163.839 MEM2_ADDR.27@100.076,160.147
I_MEMORY.ADDR14_Data_mem1: MEM1_ADDR.29 MEMORY1.22 | length 33.7
  Top Layer w0.2: MEMORY1.22@203.72,188.486 204.826,188.486 206.553,186.759 206.553,158.674 MEM1_ADDR.29@205.105,157.226
I_MEMORY.ADDR14_Data_mem2: MEM2_ADDR.29 MEMORY2.22 | length 45.3
  Top Layer w0.2: v1(96.063,190.144) 105.53,190.144 107.315,188.359 MEMORY2.22@109.994,188.359
  Mid-Layer 2 w0.2: v1(96.063,190.144) 96.063,161.62 MEM2_ADDR.29@97.536,160.147
I_MEMORY.ADDR15_Data_mem1: MEM1_ADDR.31 MEMORY1.21 | length 33.5
  Top Layer w0.2: MEMORY1.21@203.72,187.686 v1(204.826,187.686)
  Mid-Layer 2 w0.2: v1(204.826,187.686) 208.61,183.901 208.61,158.191 MEM1_ADDR.31@207.645,157.226
I_MEMORY.ADDR15_Data_mem2: MEM2_ADDR.31 MEMORY2.21 | length 44.1
  Top Layer w0.2: MEM2_ADDR.31@94.996,160.147 94.996,187.731 96.698,189.433 105.568,189.433 107.442,187.559 MEMORY2.21@109.994,187.559
I_MEMORY.ADDR16_Data_mem1: MEM1_ADDR.33 MEMORY1.20 | length 39.6
  Top Layer w0.2: v1(202.616,188.138) 202.616,187.29 203.02,186.886 MEMORY1.20@203.72,186.886
  Mid-Layer 2 w0.2: v1(202.616,188.138) 208.483,188.138 209.22,187.401 209.22,158.191 MEM1_ADDR.33@210.185,157.226
I_MEMORY.ADDR16_Data_mem2: MEM2_ADDR.33 MEMORY2.20 | length 42.2
  Top Layer w0.2: v1(108.89,186.766) 108.897,186.759 MEMORY2.20@109.994,186.759
  Mid-Layer 1 w0.2: v1(92.456,183.388) 95.834,186.766 v1(108.89,186.766)
  Mid-Layer 2 w0.2: MEM2_ADDR.33@92.456,160.147 v1(92.456,183.388)
I_MEMORY.ADDR17_Data_mem1: MEM1_ADDR.35 MEMORY1.19 | length 44.5
  Top Layer w0.2: MEMORY1.19@203.72,186.086 202.864,186.086 202.209,186.741 202.209,188.57 202.667,189.027 210.033,189.027 211.15,187.909 211.15,158.801 MEM1_ADDR.35@212.725,157.226
I_MEMORY.ADDR17_Data_mem2: MEM2_ADDR.35 MEMORY2.19 | length 50.5
  Top Layer w0.2: MEMORY2.19@109.994,185.959 110.947,185.959 111.089,186.101 v1(111.089,187.223)
  Mid-Layer 1 w0.2: v1(89.916,187.223) v1(111.089,187.223)
  Mid-Layer 2 w0.2: MEM2_ADDR.35@89.916,160.147 v1(89.916,187.223)
I_MEMORY.ADDR18_Data_mem1: MEM1_ADDR.37 MEMORY1.18 | length 47.9
  Top Layer w0.2: v1(202.311,185.598) 202.623,185.286 MEMORY1.18@203.72,185.286
  Mid-Layer 2 w0.2: v1(202.311,185.598) 202.209,185.699 202.209,188.366 202.413,188.57 212.268,188.57 216.23,184.607 216.23,158.191 MEM1_ADDR.37@215.265,157.226
I_MEMORY.ADDR18_Data_mem2: MEM2_ADDR.37 MEMORY2.18 | length 35.3
  Top Layer w0.2: v1(108.483,185.159) MEMORY2.18@109.994,185.159
  Bottom Layer w0.2: MEM2_ADDR.37@87.376,160.147 87.376,162.966 106.4,181.99 106.4,183.075 v1(108.483,185.159)
I_MEMORY.BUS0_Data_mem1: MEM1_DATA.1 MEMORY1.7 | length 34.6
  Top Layer w0.2: MEMORY1.7@203.72,176.486 205.232,176.486 205.638,176.892 v1(205.638,186.055)
  Mid-Layer 1 w0.2: v1(205.638,186.055) 214.452,194.869 214.452,204.394 MEM1_DATA.1@213.487,205.359
I_MEMORY.BUS0_Data_mem2: MEM2_DATA.1 MEMORY2.7 | length 44.5
  Top Layer w0.2: MEMORY2.7@109.994,176.359 111.093,176.359 v1(111.1,176.352)
  Mid-Layer 2 w0.2: MEM2_DATA.1@94.361,204.47 95.936,206.045 95.936,207.67 96.241,207.975 97.942,207.975 98.476,207.442 98.476,202.59 111.506,189.56 111.506,176.759 v1(111.1,176.352)
I_MEMORY.BUS1_Data_mem1: MEM1_DATA.3 MEMORY1.8 | length 37.2
  Top Layer w0.2: v1(202.317,177.286) MEMORY1.8@203.72,177.286
  Mid-Layer 2 w0.2: v1(202.317,177.286) 201.609,177.994 201.609,194.472 206.832,199.695 206.832,205.207 208.483,206.858 209.448,206.858 MEM1_DATA.3@210.947,205.359
I_MEMORY.BUS1_Data_mem2: MEM2_DATA.3 MEMORY2.8 | length 51.1
  Top Layer w0.2: MEM2_DATA.3@96.901,204.47 98.151,205.72 115.158,205.72 115.646,205.232 115.646,180.69 112.116,177.159 MEMORY2.8@109.994,177.159
I_MEMORY.BUS2_Data_mem1: MEM1_DATA.5 MEMORY1.9 | length 33.7
  Top Layer w0.2: MEMORY1.9@203.72,178.086 v1(205.232,178.086)
  Mid-Layer 2 w0.2: v1(205.232,178.086) 201.909,181.409 201.909,188.498 209.372,195.961 209.372,204.394 MEM1_DATA.5@208.407,205.359
I_MEMORY.BUS2_Data_mem2: MEM2_DATA.5 MEMORY2.9 | length 37.9
  Top Layer w0.2: MEMORY2.9@109.994,177.959 v1(111.1,177.959)
  Mid-Layer 2 w0.2: MEM2_DATA.5@99.441,204.47 111.811,192.1 111.811,176.327 111.354,175.87 110.795,175.87 110.693,175.971 110.693,177.553 v1(111.1,177.959)
I_MEMORY.BUS3_Data_mem1: MEM1_DATA.7 MEMORY1.10 | length 35
  Top Layer w0.2: v1(202.622,178.892) 202.628,178.886 MEMORY1.10@203.72,178.886
  Mid-Layer 2 w0.2: v1(202.622,178.892) 203.2,178.314 203.2,177.298 202.737,176.835 201.981,176.835 201.295,177.521 201.295,197.358 204.577,200.64 204.577,204.069 MEM1_DATA.7@205.867,205.359
I_MEMORY.BUS3_Data_mem2: MEM2_DATA.7 MEMORY2.10 | length 39.9
  Top Layer w0.2: v1(108.89,176.2) 108.89,178.53 109.118,178.759 MEMORY2.10@109.994,178.759
  Mid-Layer 2 w0.2: MEM2_DATA.7@101.981,204.47 112.116,194.335 112.116,175.971 111.709,175.565 109.525,175.565 v1(108.89,176.2)